# Altium PCB Avometer v1.3.PcbDoc
Units mm, origin at the board's own origin, x right, y up, seen from the top; angles counter-clockwise.
Board outline 35 x 30 mm, 2 copper layers (Top Layer, Bottom Layer), stack 1.571 mm thick; 40 components, 40 nets, 156 pads, 0 vias.
Unrouted connection lines stored in the file: 94.
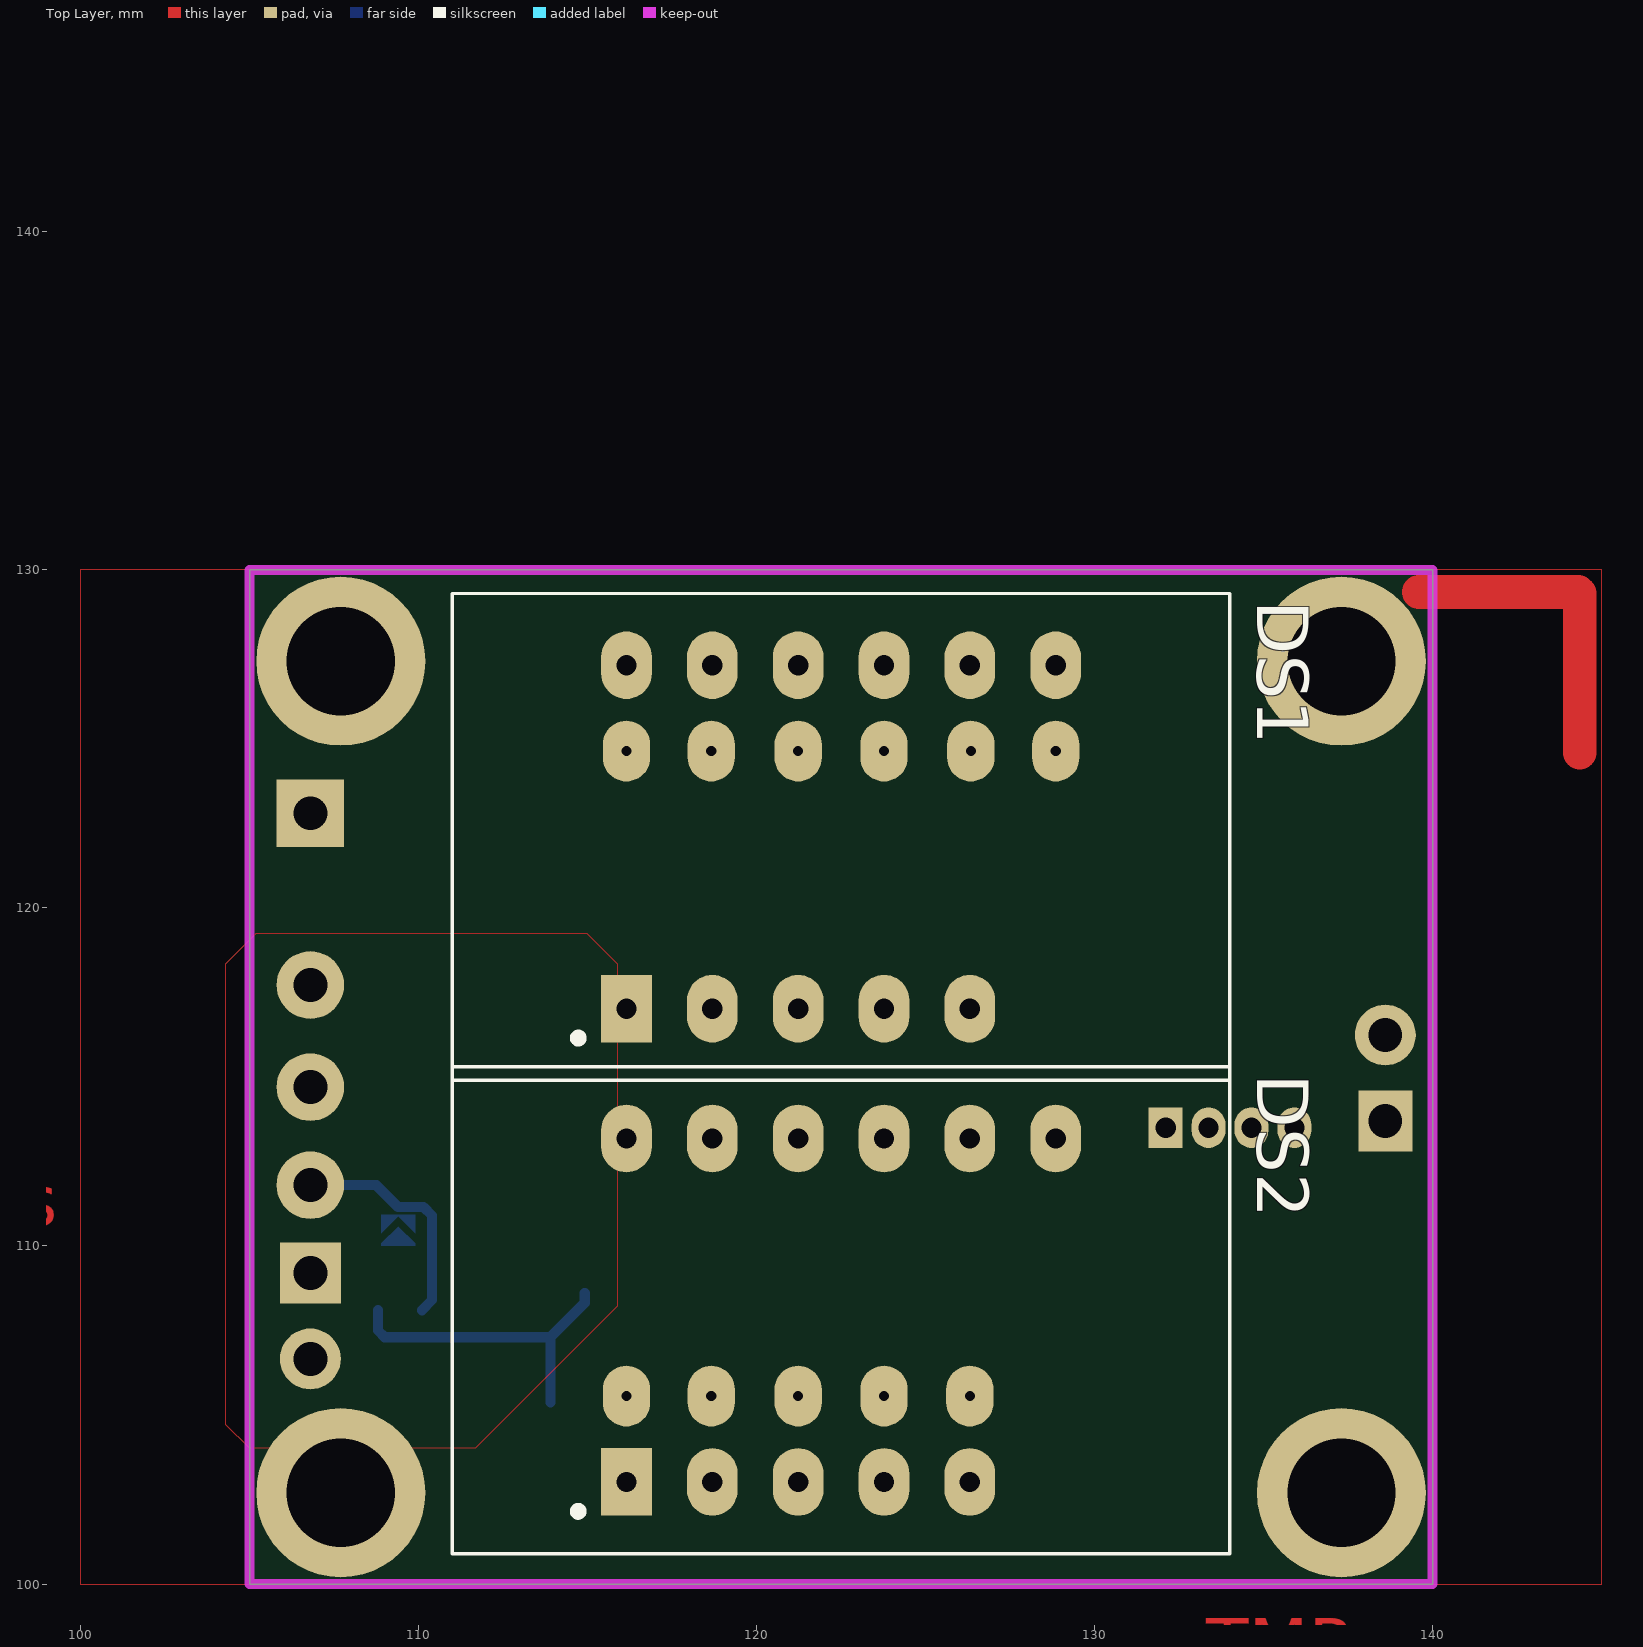
[diagram p0: Top Layer view]
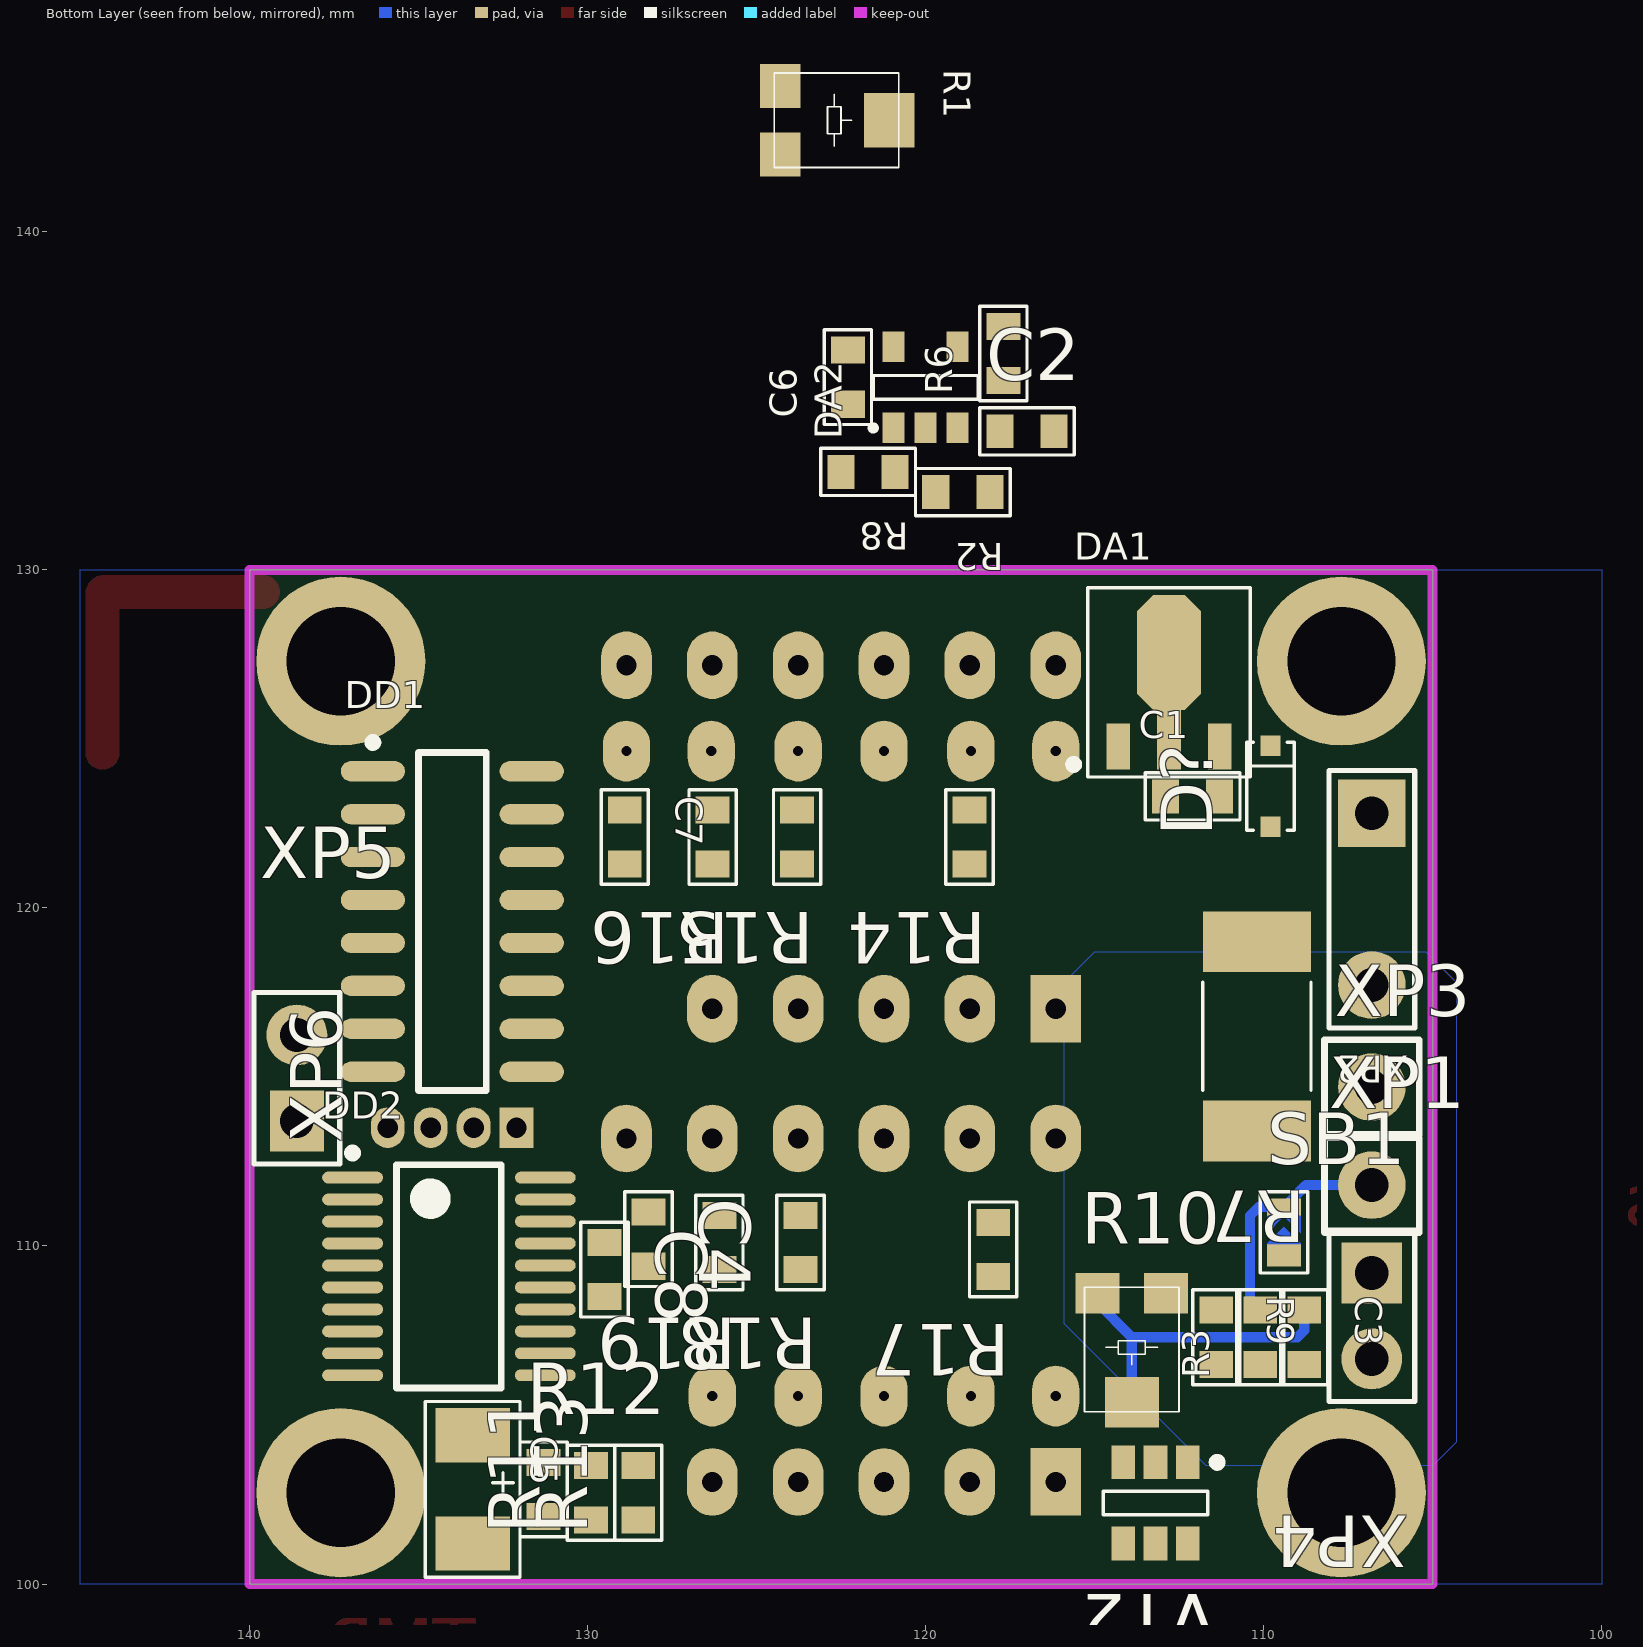
[diagram p1: Bottom Layer view, seen from below]

## Layer stack, top to bottom
Top Solder: solder mask 0.0102, Solder Resist, Dk 3.5
Top Layer: signal copper 0.0356
Dielectric 1: dielectric 1.5, FR-4, Dk 4.8
Bottom Layer: signal copper 0.0356
Bottom Solder: solder mask 0.0102, Solder Resist, Dk 3.5

## Board outline
105,100 140,100 140,130 105,130

## Design rules (kind name [scope] priority, off if disabled: settings)
AssemblyTestPointUsage [All] p1 off:
AssemblyTestpoint [All] p1 off: testpointundercomponent=TRUE minsize=1.016 maxsize=2.54 preferedsize=1.524 minholesize=0 maxholesize=1.016 preferedholesize=0.813 testpointgrid=0.025 usegrid=TRUE gridtolerance=0 allowsidetop=TRUE allowsidebottom=TRUE
Clearance KeepOutClrnc [All vs OnLayer('Keep-Out Layer')] p1: gap=0 ignorepadtopadclearanceinfootprint=FALSE
Clearance Cl-nce_USBUF [(ObjectKind = 'Pad') and (Component = 'DA10') vs ispad or isvia or istrack or isregion] p2: gap=0.15 ignorepadtopadclearanceinfootprint=FALSE except(0: Arc-Hole Track-Hole SMDPad-Hole THPad-Hole Via-Hole Fill-Hole Poly-Hole Region-Hole Text-Hole)
Clearance Cl-nce_Poly-Pads&Vias_1 [InPolygon vs ispad or isvia or istrack or isregion or isfill] p3: gap=0.4 ignorepadtopadclearanceinfootprint=FALSE except(0: Arc-Hole Track-Hole SMDPad-Hole THPad-Hole Via-Hole Fill-Hole Poly-Hole Region-Hole Text-Hole)
Clearance [All] p4: gap=0.2 ignorepadtopadclearanceinfootprint=FALSE except(0: Arc-Hole Track-Hole SMDPad-Hole THPad-Hole Via-Hole Fill-Hole Poly-Hole Region-Hole Text-Hole)
ComponentClearance [All] p1: gap=0 collisioncheckmode=3 verticalgap=0 showdistances=TRUE
DiffPairsRouting [All] p1: maxlimit=100 minlimit=0.25 mostfreqgap=0.254 toplayer_minwidth=0.2 toplayer_maxwidth=0.5 toplayer_prefwidth=0.25 bottomlayer_minwidth=0.2 bottomlayer_maxwidth=0.5 bottomlayer_prefwidth=0.25 maxuncoupledlength=50
FabricationTestPointUsage [All] p1 off: valid=0 allowmultiple=FALSE
FabricationTestpoint [All] p1 off: side=3 testpointundercomponent=TRUE minsize=1.016 maxsize=2.54 preferedsize=1.524 minholesize=0 maxholesize=1.016 preferedholesize=0.813 testpointgrid=0.025 allowsidetop=TRUE allowsidebottom=TRUE usegrid=TRUE gridtolerance=0
HoleSize [All] p1: absolutevalues=TRUE maxlimit=4 minlimit=0.025 maxpercent=80.000 minpercent=20.000
MatchedLengths [InNetClass('DiffPairs')] p1: tolerance=1 checknetsindiffpair=TRUE checkdiffpairvsdiffpair=FALSE checkxsignals=FALSE checkothers=FALSE
PlaneClearance [All] p1: clearance=0.1
PolygonConnect PCon_fill [All vs isregion or isfill] p1 off: connectstyle=Direct reliefconductorwidth=0.254 reliefentries=4 polygonreliefangle="90 Angle" airgapwidth=0.254
PolygonConnect PCon_via [All vs isvia] p2: connectstyle=Relief reliefconductorwidth=0.3 reliefentries=4 polygonreliefangle="90 Angle" airgapwidth=0.25
PolygonConnect [All] p3: connectstyle=Relief reliefconductorwidth=0.5 reliefentries=4 polygonreliefangle="90 Angle" airgapwidth=0.5
RoomDefinition "Avometer v1.3" [InComponentClass('Avometer v1.3')] p1: confinementstyle=ConfineIn formatcopy=TRUE lockcomponents=FALSE outline 146.2,101.5 150.8,101.5 150.8,109.2 146.2,109.2
RoutingVias [All] p1: holewidth=0.3 width=1.27 viastyle="Through Hole" minholewidth=0.3 minwidth=1.27 maxholewidth=0.3 maxwidth=1.27
SilkToBoardRegionClearance [All] p1 off:
SilkToSilkClearance [All] p1 off: silktosilkclearance=0
SilkToSolderMaskClearance [IsPad] p1 off: minsilkscreentomaskgap=0.1 clearancetoexposedcopper=TRUE
SolderMaskExpansion [All] p1: expansion=0.102
Width [All] p1: maxlimit=2.5 minlimit=0.3 preferedwidth=0.3
19 further rules are at their usual default settings.

## Components (designator, comment, footprint, x,y, rotation, side; value= is the part's Value field where it differs from the comment)
C1 "0.1uF" "CAP 0603_N" 112.1,123.3 r180 bottom
C2 "0.1" "CAP 0603_N" 117,134.1 r180 bottom
C3 "0.1uF" "CAP 0603_N" 108.8,107.3 r270 bottom
C4 "0.1" "CAP 0603_N" 128.2,110.2 r270 bottom
C5 "100uF 6V3" CAP_TANT_B_TYPE_3528-21 133.4,102.8 r270 bottom
C6 "0.1" "CAP 0603_N" 122.3,135.7 r90 bottom
C7 "0.1" "CAP 0603_N" 128.9,122.1 r270 bottom
C8 "0.1" "CAP 0603_N" 129.5,109.3 r270 bottom
D? "1N4148WS" SOD-323 109.8,123.6 r90 bottom
DA1 "L78L33ABUTR" SOT-89 112.8,125 r180 bottom
DA2 "MCP6001" SOT-23-5_L 120,135.4 r90 bottom
DD1 "74HC595D SMD" SOIC-16_L 134,119.6 r180 bottom
DD2 "STM32F030F4P6" TSSOP-20_N 134.1,109.1 r180 bottom
DS1 "7SEGM_KEM-3631-AG" 7SEGM_KEM-3631-AG_BLUE 122.5,122.1 r0 top locked
DS2 "7SEGM_KEM-3631-AG" 7SEGM_KEM-3631-AG_RED 122.5,108.1 r0 top locked
R1 "10k" "RES VAR 1" 122.7,143.3 r270 bottom
R2 "100k" "RES 0603_N" 118.9,132.3 r0 bottom
R3 "100k" "RES 0603_N" 110.1,107.3 r90 bottom
R6 "4k7" "RES 0603_N" 117.7,136.4 r90 bottom
R7 "0.02" "RES 2512" 110.2,116.2 r270 bottom
R8 "100k" "RES 0603_N" 121.7,132.9 r0 bottom
R9 "15k" "RES 0603_N" 111.4,107.3 r270 bottom
R10 "10k" "RES VAR 1" 113.9,107 r0 bottom
R11 "47" "RES 0603_N" 129.9,102.7 r90 bottom
R12 "33k" "RES 0603_N" 131.3,102.8 r90 bottom
R13 "100k" "RES 0603_N" 128.5,102.7 r90 bottom
R14 "47" "RES 0603_N" 118.7,122.1 r270 bottom
R15 "47" "RES 0603_N" 123.8,122.1 r270 bottom
R16 "47" "RES 0603_N" 126.3,122.1 r270 bottom
R17 "47" "RES 0603_N" 118,109.9 r270 bottom
R18 "47" "RES 0603_N" 123.7,110.1 r270 bottom
R19 "47" "RES 0603_N" 126.1,110.1 r270 bottom
SB1 "Source" JUMPER_SOLDERED 109.4,110.4 r90 bottom
VT2 "IRLTS6342" TSOP-6 113.2,102.4 r0 bottom
XP1 "USENSE" CON_PIN 106.8,111.8 r180 bottom
XP2 "Input" CON_5.08MM_1X2 106.8,122.8 r270 bottom
XP3 "Output" CON_PIN 106.8,114.7 r270 bottom
XP4 "Fun" CON_2.54MM_1X2#1 106.8,109.2 r270 bottom
XP5 "Temp" CON_2.54MM_1X2#2 138.6,113.7 r90 bottom
XP6 "SWD" CON_1.27MM_1X4_SWD 132.1,113.5 r0 bottom

## Footprints (in the part's own frame and the unit in brackets; to place one, negate y for a bottom-side part, rotate by r counter-clockwise, add the part's x,y. Pads: shape width x height; smd on the part's side, far side on the other; paste and mask are expansions set on the pad)
7SEGM_KEM-3631-AG_BLUE [mm] "LED, 7-Segment Display, 7.62 mm, RHD; 10 Leads; Row Space 5.08 mm; Pitch 2.54 mm"
  rect 1.5x2 hole 0.6: 1(-6.35,-5.08)
  oval 1.5x2 hole 0.6: 2(-3.81,-5.08) 3(-1.27,-5.08) 4(1.27,-5.08) 5(3.81,-5.08) 7(6.35,5.08) 8(3.81,5.08) 9(1.27,5.08) 10(-1.27,5.08) 11(-3.81,5.08) 12(-6.35,5.08)
  silkscreen extent -11.5,-7.2 11.5,7.2, body extent -11.3,-7.05 11.3,7.05, height 8.21
7SEGM_KEM-3631-AG_RED [mm] "LED, 7-Segment Display, 7.62 mm, RHD; 10 Leads; Row Space 5.08 mm; Pitch 2.54 mm"
  rect 1.5x2 hole 0.6: 1(-6.35,-5.08)
  oval 1.5x2 hole 0.6: 2(-3.81,-5.08) 3(-1.27,-5.08) 4(1.27,-5.08) 5(3.81,-5.08) 7(6.35,5.08) 8(3.81,5.08) 9(1.27,5.08) 10(-1.27,5.08) 11(-3.81,5.08) 12(-6.35,5.08)
  silkscreen extent -11.5,-7.2 11.5,7.2, body extent -11.3,-7.05 11.3,7.05, height 7.2
"CAP 0603_N" [mm] "Chip Capacitor; Body 1.6 x 0.8 mm (LxW typ)"
  rect 0.8x1 smd: 1(-0.8,0) 2(0.8,0)
  silkscreen extent -1.4,-0.7 1.4,0.7, body extent -0.8,-0.4 0.8,0.4, height 0.6
CAP_TANT_B_TYPE_3528-21 [mm] "Capacitor, SM Tantalum; Body 3.5 x 2.8 mm (LxW typ)"
  rect 1.6x2.2 smd: 1(-1.6,0) 2(1.6,0)
  silkscreen extent -2.6,-1.4 2.6,1.4, body extent -1.75,-1.4 1.75,1.4, height 1.9
CON_1.27MM_1X4_SWD [mm] "Connector; Header; 4 Position"
  rect 1x1.2 hole 0.6: 1(0,0)
  oval 1x1.2 hole 0.6: 2(1.27,0) 3(2.54,0) 4(3.81,0)
CON_2.54MM_1X2#1 [mm] "Connector; Header; 2 Position"
  rect 1.8x1.8 hole 1: 1(0,0)
  round 1.8 hole 1: 2(2.54,0)
  silkscreen extent -1.27,-1.27 3.8,1.27, body extent -1.28,-1.27 3.8,1.27, height 8.63
CON_2.54MM_1X2#2 [mm] "Connector; Header; 2 Position"
  rect 1.8x1.6 hole 1: 1(0,0)
  round 1.8 hole 1: 2(2.54,0)
  silkscreen extent -1.27,-1.27 3.8,1.27, body extent -1.28,-1.27 3.8,1.27, height 8.63
CON_5.08MM_1X2 [mm] "Connector; Header; 2 Position"
  rect 2x2 hole 1: 1(0,0)
  round 2 hole 1: 2(5.08,0)
  silkscreen extent -1.27,-1.27 6.35,1.27, body extent -1.27,-1.27 6.35,1.27, height 8.5
CON_PIN [mm] "Connector; Plug"
  round 2 hole 1: 1(0,0)
  silkscreen extent -1.4,-1.4 1.4,1.4, body extent -1.27,-1.27 1.27,1.27, height 8.85
JUMPER_SOLDERED [mm] "Chip Resistor, Body 2.0x1.2mm, IPC Low Density"
  rect 0.65x1 smd: 1(-0.675,0)
  rect 0.5x1 smd: 2(0.75,0)
  Top Layer region: -0.025,0.5 -0.025,0.5 0.475,0 -0.025,-0.5 0.525,-0.5 0.525,0.5
  Top Layer region: -0.4,-0.5 -0.4,0.5 -0.325,0.5 -0.325,0.5 0.175,0 -0.325,-0.5
  silkscreen extent -1.2,-0.7 1.2,0.7
"RES 0603_N" [mm] "Chip Resistor, Body 2.0x1.2mm, IPC Low Density"
  rect 0.8x1 smd: 1(-0.8,0) 2(0.8,0)
  silkscreen extent -1.4,-0.7 1.4,0.7, body extent -0.85,-0.4 0.85,0.4, height 0.56
"RES 2512" [mm] "Chip Resistor; Body 6.3 x 3.2 mm (LxW typ)"
  rect 1.8x3.2 smd: 1(-2.8,0) 2(2.8,0)
  silkscreen extent -1.6,-1.6 1.6,1.6, body extent -3.2,-1.6 3.2,1.6, height 0.6
"RES VAR 1" [mm] "Chip Resistor, Body 2.0x1.2mm, IPC Low Density"
  rect 1.3x1.2 smd: 1(-1.016,-1.6) 3(1.016,-1.6)
  rect 1.6x1.5 smd: 2(0,1.626)
  silkscreen extent -1.4,-1.78 1.4,1.91
SOD-323 [mm] "SOD-123; 2 Leads; Body 2.7 x 1.6 mm, (LxW)"
  rect 0.6x0.6 smd: 1(-1.2,0) 2(1.2,0)
  silkscreen extent -1.3,-0.7 1.3,0.7, body extent -1.3,-0.68 1.3,0.67, height 1.1
SOIC-16_L [mm] "SOIC, 16-Leads, Body 9.9x3.9mm, Pitch 1.27mm, IPC High Density"
  oval 1.9x0.6 smd: 1(-2.35,4.445) 2(-2.35,3.175) 3(-2.35,1.905) 4(-2.35,0.635) 5(-2.35,-0.635) 6(-2.35,-1.905) 7(-2.35,-3.175) 8(-2.35,-4.445) 9(2.35,-4.445) 10(2.35,-3.175) 11(2.35,-1.905) 12(2.35,-0.635) 13(2.35,0.635) 14(2.35,1.905) 15(2.35,3.175) 16(2.35,4.445)
  silkscreen extent -2.48,-5 1,5.42, body extent -3,-4.95 3,4.95, height 1.4
SOT-23-5_L [mm] "SOT23, 5-Leads, Body 2.9x1.7mm, Pitch 0.95mm, Lead Span 2.8mm, IPC High Density"
  rect 0.9x0.65 smd: 1(-1.2,0.95) 2(-1.2,0) 3(-1.2,-0.95) 4(1.2,-0.95) 5(1.2,0.95)
  silkscreen extent -1.28,-1.55 0.35,1.63, body extent -1.5,-1.5 1.5,1.5, height 1.3
SOT-89 [mm] "SOT-89; Body 4.6 x 4.25 mm, inc. leads (LxW max)"
  rect 0.7x1.35 smd: 1(-1.5,-0.225) 3(1.5,-0.225)
  rect 0.7x1.8 smd: 2(0,0)
  oct 1.9x3.4 smd: 2(0,2.563)
  silkscreen extent -2.94,-1.12 2.4,4.48, body extent -2.25,-0.42 2.25,3.88, height 1.49
TSOP-6 [mm] "SOT-457/SC-74; 6 Leads; Body 3.1 x 2.9 mm, inc. leads (LxW max)"
  rect 0.7x1 smd: 1(-0.95,-1.2) 2(0,-1.2) 3(0.95,-1.2) 4(0.95,1.2) 5(0,1.2) 6(-0.95,1.2)
  silkscreen extent -1.95,-1.32 1.55,0.35, body extent -1.5,-1.5 1.5,1.5, height 1.3
TSSOP-20_N [mm] "SOP, 20-Leads, Body 6.6x4.5mm, Pitch 0.65mm, IPC Medium Density"
  oval 1.8x0.35 smd: 1(-2.85,2.925) 2(-2.85,2.275) 3(-2.85,1.625) 4(-2.85,0.975) 5(-2.85,0.325) 6(-2.85,-0.325) 7(-2.85,-0.975) 8(-2.85,-1.625) 9(-2.85,-2.275) 10(-2.85,-2.925) 11(2.85,-2.925) 12(2.85,-2.275) 13(2.85,-1.625) 14(2.85,-0.975) 15(2.85,-0.325) 16(2.85,0.325) 17(2.85,0.975) 18(2.85,1.625) 19(2.85,2.275) 20(2.85,2.925)
  silkscreen extent -2.98,-3.3 1.55,3.77, body extent -3.27,-3.3 3.28,3.3, height 1.2

## Part data
C1 C2 C4 C6 C7 C8: library part CAP_SMD, "Capacitor SMD"
C3: library part CAP_SMD
C5: library part CAP_SMD_TANT, "Capacitor SMD Tantalum"
D?: "Small Signal Fast Switching Diode", PackageDocument=Aug-1999, ComponentLink1Description="Manufacturer Link", ComponentLink1URL=http://www.fairchildsemi.com/, ComponentLink2Description=Datasheet, ComponentLink2URL=http://www.fairchildsemi.com/ds/1N%2F1N5400.pdf, DatasheetDocument=1998, LatestRevisionDate=17-Jul-2002, LatestRevisionNote="Re-released for DXP Platform.", PackageReference=DO-201AD, Published=8-Jun-2000, Publisher="Altium Limited"
DA1: "Vin=30V Positive Voltage Regulator", ComponentLink1Description="Manufacturer Link", ComponentLink1URL=http://www.st.com/, DatasheetVersion=Feb-1999, LatestRevisionDate=17-Jul-2002, LatestRevisionNote="Re-released for DXP Platform.", PackageDescription="TO, Flat Index; 3 In-Line, Axial Leads; Body Dia. 4.8mm; Leads 0.51 x 0.51 mm (max)", PackageReference=TO92, Published=24-Aug-2001, Publisher="Altium Limited"
DA2: "1 MHz, Low-Power Op Amp"
DD1: "8-Bit Shift Register with 3-State Output Registers", Code_IPC=SOIC127P600-16, ComponentLink1Description="Manufacturer Link", ComponentLink1URL=http://www.ti.com/, ComponentLink2Description=Datasheet, ComponentLink2URL=http://www-s.ti.com/sc/ds/sn74hc595.pdf, DatasheetVersion=May-1997, LatestRevisionDate=13-Apr-2006, LatestRevisionNote="IPC-7351 Footprint Added.", PackageDescription="16-Pin Small Outline Integrated Circuit 1.27 mm Pitch", PackageReference=D016, PackageVersion=Jan-1998, Published=8-Jun-2000, Publisher="Altium Limited"
DD2: "Cortex-M0 32-bit MCU, 16 KB Flash, 4 KB Internal RAM, 15 I/Os, 20-pin TSSOP, -40 to 85 degC"
DS1 DS2: "7.62 mm Black Surface Green 7-Segment Display: CC, RH DP", Colour=Green, ComponentLink1Description="Manufacturer Link", ComponentLink1URL=http://www.agilent.com/, DatasheetVersion=19-Feb-2002, LatestRevisionDate=17-Dec-2003, LatestRevisionNote="Schematic revised, PCB Footprint replaced.", MinimumIntensity="860 ucd", Note="IF = 10 mA", PackageDescription="LED, 7-Segment Display, 7.62 mm, RHD; 10 Leads; Row Space 5.08 mm; Pitch 2.54 mm", PackageReference=A, PackageVersion=11-Feb-2002, Published=8-Jun-2000, Publisher="Altium Limited"
R1 R10: library part RES_SMD_Tap, "Tapped Resistor", LatestRevisionDate=17-Jul-2002, LatestRevisionNote="Re-released for DXP Platform.", PackageDescription="Variable Resistor, Thru-Hole; 3 Leads", PackageReference=VR3, Published=24-Mar-1999, Publisher="Altium Limited", Set Position=0.5, Sim Note="Enter the Resistance value and the set point into parameter fields."
R2 R6 R8 R14 R15 R16 R17 R18 R19: library part Resistor_SMD
R3 R9: library part RES_SMD
R7: library part RES_SMD, "Resistor"
R11 R12 R13: library part RES_SMD, "Chip Resistor"
SB1: library part Jumper_SMD, "Jumper"
VT2: "30V, 6.7A, 1V N-Channel MOSFET", ComponentLink1Description="Manufacturer Link", ComponentLink1URL=http://www.irf.com/, ComponentLink2Description=Datasheet, ComponentLink2URL=http://www.irf.com/product-info/datasheets/data/irlz34n.pdf, DatasheetVersion=Aug-1997, LatestRevisionDate=17-Jul-2002, LatestRevisionNote="Re-released for DXP Platform.", Note="Pin 2 is electrically connected to pin 4.", PackageDescription="TO, Thru-Hole, Vertical, Heatsink Mounted; 3 In-Line Leads; Pitch 2.54 mm", PackageReference=TO-220AB, PackageVersion=Feb-1997, Published=8-Jun-2000, Publisher="Altium Limited"
XP1 XP3: library part CON_1x1_PIN, "Plug papa", LatestRevisionDate=17-Jul-2002, LatestRevisionNote="Re-released for DXP Platform.", Publisher="Altium Limited"
XP2: library part CON_5.08mm_1x2, "Header, 2-Pin", LatestRevisionDate=17-Jul-2002, LatestRevisionNote="Re-released for DXP Platform.", Publisher="Altium Limited"
XP4 XP5: library part CON_2.54mm_1x2, "Header, 2-Pin", LatestRevisionDate=17-Jul-2002, LatestRevisionNote="Re-released for DXP Platform.", Publisher="Altium Limited"
XP6: library part CON_1.27mm_1x4_SWD, "Header, 3-Pin", LatestRevisionDate=17-Jul-2002, LatestRevisionNote="Re-released for DXP Platform.", Publisher="Altium Limited"

## Free pads (board coordinates)
  round 5 hole 3.2: 0(107.7,127.3) 0(107.7,102.7) 0(137.3,102.7) 0(137.3,127.3)
  oval 1.4x1.8 hole 0.3: 1(116.15,105.56) 1(116.15,124.64) 1(118.66,105.56) 1(118.66,124.64) 1(121.23,105.56) 1(121.23,124.64) 1(123.77,105.56) 1(123.77,124.64) 1(126.31,105.56) 1(126.34,124.64) 1(128.85,124.64)

## Nets (pads, with @x,y where several pads share a name; then routed paths per layer and width w, separated by ;. In a path a pad name is that pad's centre, name@x,y a point inside that pad or via, vN(x,y) a via of type N, cw(c..) or ccw(c..) an arc to the next point about the centre after c; other vN are vias at no path point)
24V: D?.1 SB1.1 XP2.1 XP4.1
FUN: DD2.10 R11.2
GND: C1.1 C2.1 C3.1 C4.1 C5.2 C6.1 C7.2 C8.2 DA1.2 DA2.2 DD1.8 DD1.13 DD2.1 DD2.15 R6.1 R7.1 R8.1 R10.2 R10.3 R12.1 R13.1 VT2.4 XP2.2 XP6.3 | length 9.4
  Bottom Layer w0.3: C3.1 108.8,107.5 109,107.3 113.9,107.3 ; R10.2 113.9,107.3 ; R10.3 114.916,108.316 113.9,107.3
K1: DD2.9 R14.2
K2: DD2.12 R15.2
K3: DD2.17 R16.2
K4: DD2.8 R17.2
K5: DD2.7 R18.2
K6: DD2.11 R19.2
LATCH: DD1.12 DD2.3
MEAS_I: C4.2 DA2.1 DD2.14 R2.2 R8.2
MOSI: DD1.14 DD2.2
NetC1_2: C1.2 D?.2 DA1.3
NetC2_2: C2.2 DA2.3 R7.2 XP3.1
NetDA2_4: DA2.4 R1.3 R6.2
NetDD1_1: DD1.1 DS1.7 DS2.7
NetDD1_2: DD1.2 DS1.4 DS2.4
NetDD1_3: DD1.3 DS1.2 DS2.2
NetDD1_4: DD1.4 DS1.1 DS2.1
NetDD1_5: DD1.5 DS1.10 DS2.10
NetDD1_6: DD1.6 DS1.5 DS2.5
NetDD1_7: DD1.7 DS1.3 DS2.3
NetDD1_15: DD1.15 DS1.11 DS2.11
NetDS1_8: DS1.8 pad.1@126.34,124.64 R16.1
NetDS1_9: DS1.9 pad.1@123.77,124.64 R15.1
NetDS1_12: DS1.12 pad.1@118.66,124.64 R14.1
NetDS2_8: DS2.8 R19.1
NetDS2_9: DS2.9 R18.1
NetDS2_12: DS2.12 R17.1
NetR1_1: R1.1 R1.2 R2.1
NetR3_2: R3.2 SB1.2 XP1.1 | length 6.9
  Bottom Layer w0.3: XP1.1 108.75,111.8 SB1.2 110.15,111.15 110.4,110.9 110.4,108.4 R3.2
NetR9_1: R9.1 R10.1
NetR11_1: R11.1 R13.2 VT2.3
OUT_FUN: VT2.1 VT2.2 VT2.5 VT2.6 XP4.2
SCLK: DD1.11 DD2.18
SWCLK: DD2.20 XP6.2
SWDIO: DD2.19 XP6.4
TEMP: DD2.6 R12.2 XP5.2
VBAT: C3.2 DD2.13 R3.1 R9.2
VMCU: C5.1 C6.2 C7.1 C8.1 DA1.1 DA2.5 DD1.10 DD1.16 DD2.5 DD2.16 pad.0@107.7,127.3 XP5.1 XP6.1
pads on no net: DD1.9 DD2.4
copper on no net: | length 9.4
  Top Layer w1: 139.6,129.35 144.3,129.35 ; 144.35,124.6 144.35,129.3

## Polygon pours and split planes (outlines as drawn)
GND on Top Layer "NONET_L01_P018" (solid, shelved, pour order 18): 100,130 100,100 145,100 145,130
GND on Top Layer "NONET_L01_P014" (solid, shelved, pour order 14): 104.287,104.731 104.987,104.031 111.687,104.031 115.887,108.231 115.887,118.331 114.987,119.231 105.187,119.231 104.287,118.331
GND on Bottom Layer "Top Layer-No Net 1" (solid, shelved, pour order 16): 100,130 100,100 145,100 145,130
GND on Bottom Layer "NONET_L02_P012" (solid, shelved, pour order 12): 104.3,104.2 105,103.5 111.7,103.5 115.9,107.7 115.9,117.8 115,118.7 105.2,118.7 104.3,117.8

## Keep-outs
Keep-Out Layer:
  the board outline again, w0.3

## Other copper
Top Layer:
  text "v1.1" at 93.1,125.1 h1.5
  text "24V" at 91.6,121.2 h1.5
  text "GNDi" at 92.1,116 h1.5
  text "GNDo" at 92.1,113.7 h1.5
  text "Vmeas" at 92.3,110.6 h1.5
  text "FUN+" at 91.7,107.1 h1.5
  text "FUN-" at 91.7,105 h1.5
  text "TMP" at 133.3,97.5 h1.5
Bottom Layer:
  pour cut-out: 111.8,119.9